# EAGLE board fsk_board (EAGLE 7.6.0)
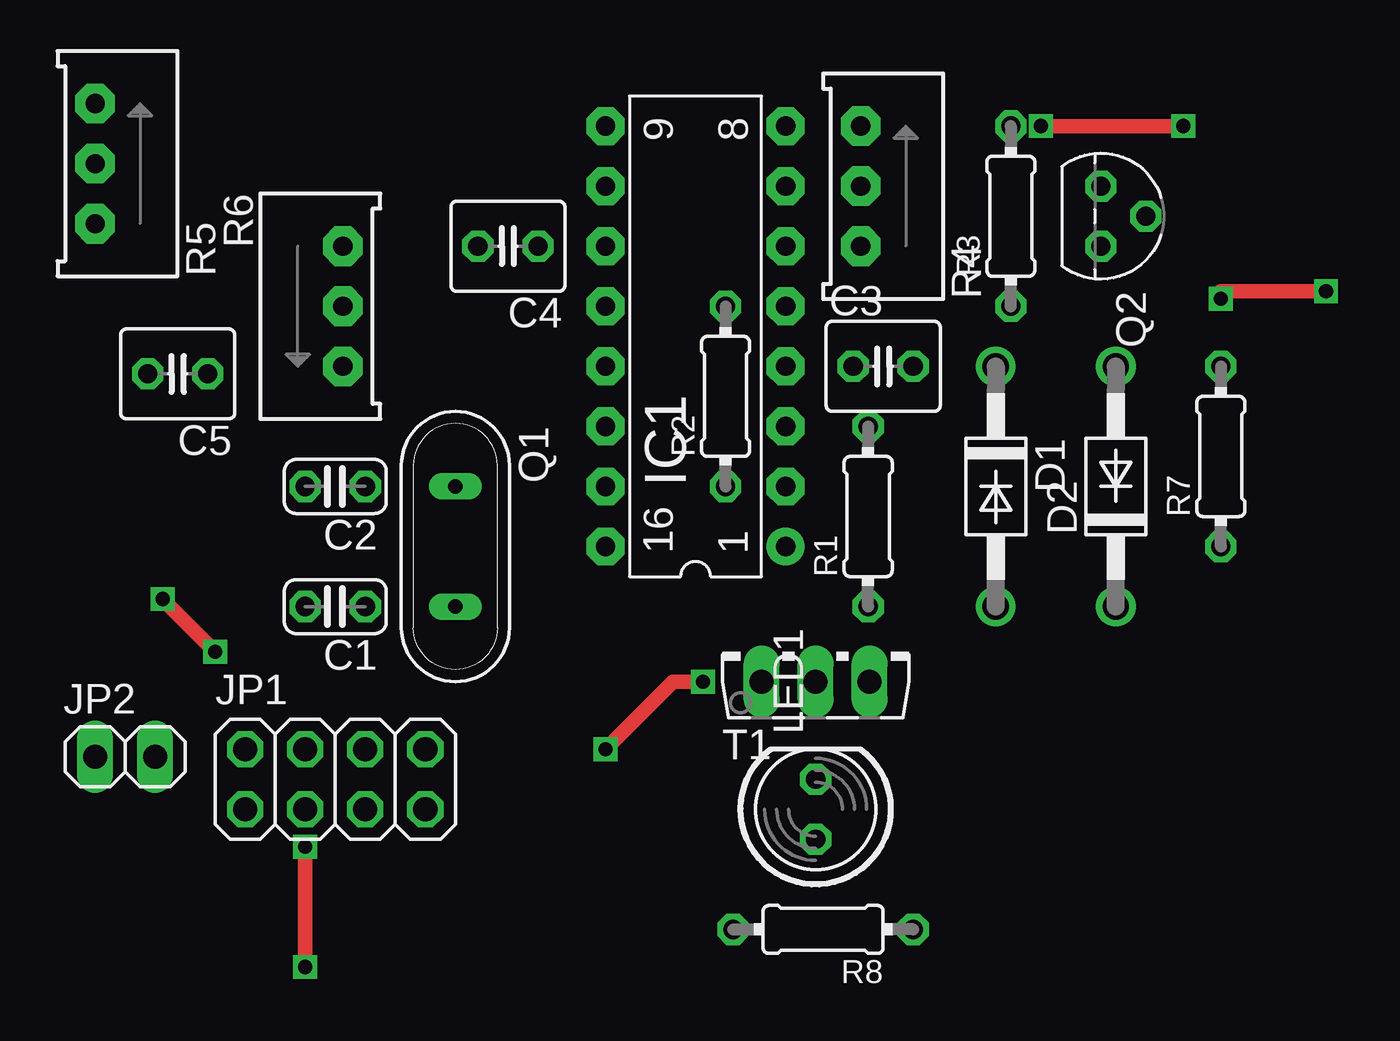
[diagram p0: board, top side]
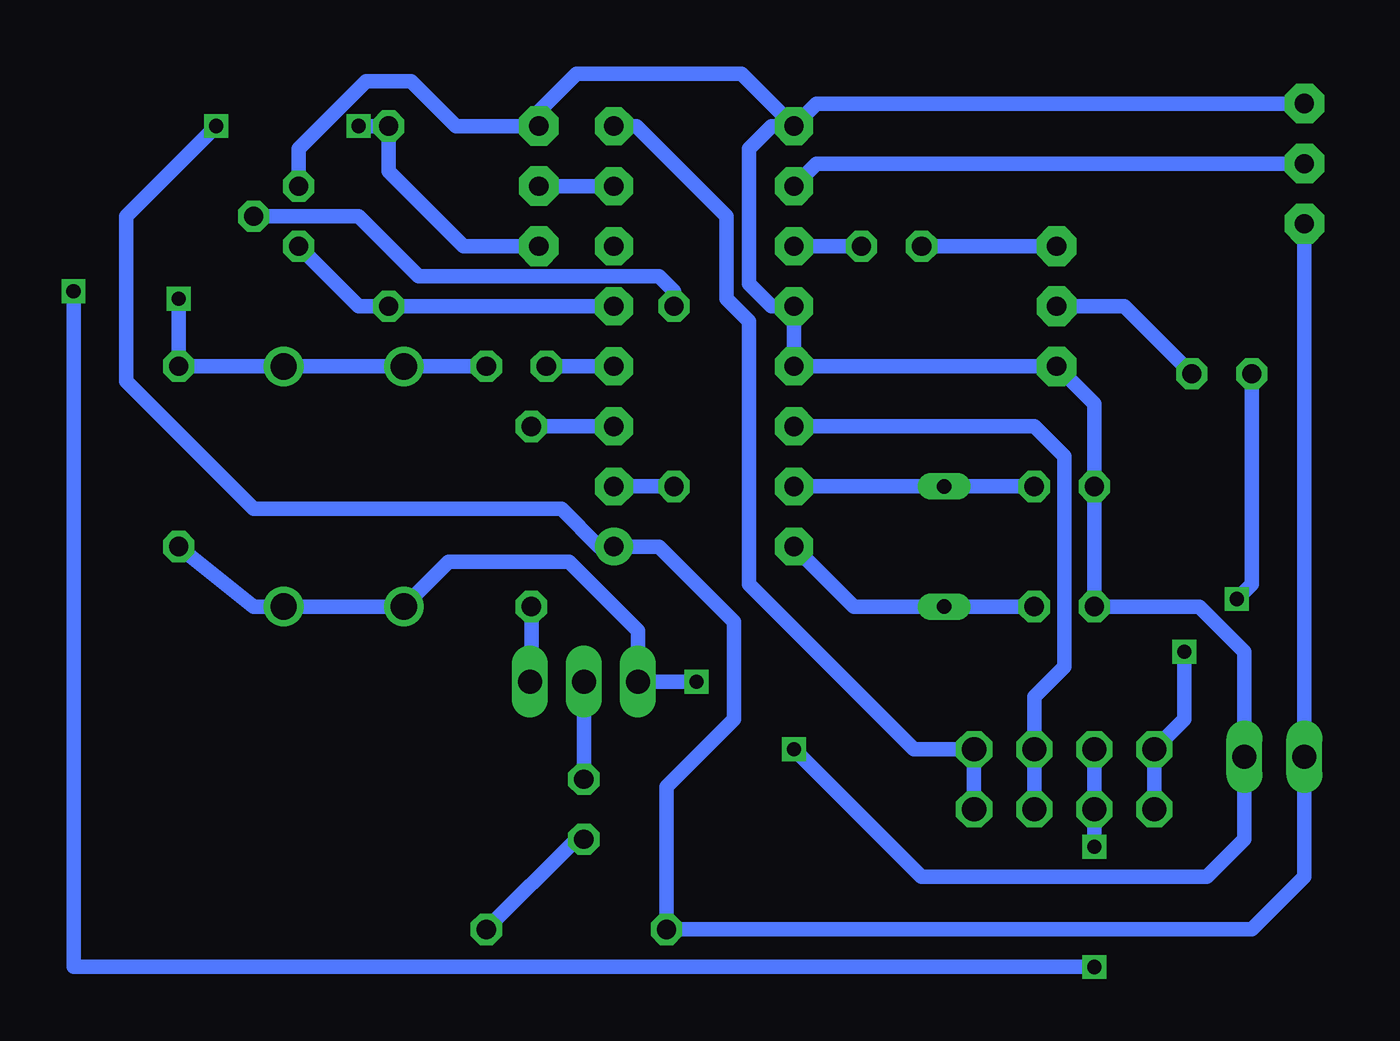
[diagram p1: board, bottom side, seen from below]

No outline drawn. Coordinates in mm, seen from the top.
Copper layers (1*16): Top 0.035mm / dielectric 1.5mm / Bottom 0.035mm
Design rules "default": minimum track width 10mil, minimum drill 24mil, track to track 8mil, track to pad 8mil, pad to pad 8mil, via to via 8mil, smd to smd 8mil, copper to edge 40mil, drill to drill 8mil, minimum pad ring 10mil, minimum via ring 8mil, stop-mask expansion 4mil, vias tented up to drill 0mil, thermal gap 10mil

## Footprints (pad centres in the part's own frame; a part is rotated, then mirrored left to right if it is on the bottom)
C025-024X044 = drill 0.813 octagon: 1 -1.27,0; 2 1.27,0
C025-040X050 = drill 0.813 octagon: 1 -1.27,0; 2 1.27,0
DO41-10 = drill 1.118: A 5.08,0; C -5.08,0
DIL16 = drill 0.813 pad 1.6: 1 -8.89,-3.81 | drill 0.813 pad 1.6 octagon: 2 -6.35,-3.81; 3 -3.81,-3.81; 4 -1.27,-3.81; 5 1.27,-3.81; 6 3.81,-3.81; 7 6.35,-3.81; 8 8.89,-3.81; 9 8.89,3.81; 10 6.35,3.81; 11 3.81,3.81; 12 1.27,3.81; 13 -1.27,3.81; 14 -3.81,3.81; 15 -6.35,3.81; 16 -8.89,3.81
2X04 = drill 1.016 octagon: 1 -3.81,-1.27; 2 -3.81,1.27; 3 -1.27,-1.27; 4 -1.27,1.27; 5 1.27,-1.27; 6 1.27,1.27; 7 3.81,-1.27; 8 3.81,1.27
1X02 = drill 1.016 long: 1 -1.27,0; 2 1.27,0
LED5MM = drill 0.813 octagon: A -1.27,0; K 1.27,0
QS = drill 0.61 long: 1 -2.54,0; 2 2.54,0
TO92 = drill 0.813 octagon: 1 1.27,0; 2 0,1.905; 3 -1.27,0
0204/7 = drill 0.813 octagon: 1 -3.81,0; 2 3.81,0
3386C = drill 0.813 pad 1.676 octagon: 1 2.54,1.27; 2 0,1.27; 3 -2.54,1.27
TO126AV = drill 1.016 long: B 2.286,-1.27; C 0,-1.27; E -2.286,-1.27

## Placement (x,y rotation side)
C1  [C025-024X044]  36.83,39.37 180 top
C2  [C025-024X044]  36.83,44.45 180 top
C3  [C025-040X050]  60.01,49.53 0 top
C4  [C025-040X050]  44.13,54.61 180 top
C5  [C025-040X050]  30.16,49.21 180 top
D1  1N4004  [DO41-10]  64.77,44.45 270 top
D2  1N4004  [DO41-10]  69.85,44.45 90 top
IC1  [DIL16]  52.07,50.8 90 top
JP1  [2X04]  36.83,32.07 0 top
JP2  [1X02]  27.94,33.02 0 top
LED1  [LED5MM]  57.15,30.8 90 top
Q1  [QS]  41.91,41.91 270 top
Q2  2N3904  [TO92]  69.22,55.88 270 top
R1  [0204/7]  59.37,43.18 90 top
R2  [0204/7]  53.34,48.26 90 top
R3  [0204/7]  65.41,55.88 90 top
R4  [3386C]  60.33,57.15 90 top
R5  [3386C]  27.94,58.1 90 top
R6  [3386C]  35.88,52.07 270 top
R7  [0204/7]  74.3,45.72 90 top
R8  [0204/7]  57.47,25.72 180 top
T1  BD139  [TO126AV]  57.15,37.47 0 top

## Library data of the parts
C1-C5 R1-R3 R7 R8 = rcl
D1 D2 = diode
IC1 = tcm3105
JP1 JP2 = pinhead
LED1 = led
Q1 = special
Q2 = Johnboiles
R4-R6 = bourns
T1 = transistor-power

## Nets
GND: C1.2 C2.2 D1.A D2.C IC1.9 IC1.12 IC1.13 JP2.2 Q2.3 R4.1 R5.1 R6.1 R7.1 T1.E
N$1: IC1.3 R1.2
N$2: R1.1 T1.B
N$3: LED1.K T1.C
N$4: C2.1 IC1.15 Q1.1
N$5: C1.1 IC1.16 Q1.2
N$6: LED1.A R8.1
N$7: IC1.2 R2.1
N$8: Q2.2 R2.2
N$9: IC1.5 Q2.1 R3.1
N$13: IC1.7 R4.2
N$14: IC1.10 R5.2
N$15: C3.1 IC1.4
N$16: C4.1 IC1.11
N$17: C4.2 R6.3
N$18: C5.1 R6.2
RXA: C3.2 D1.C D2.A JP1.3 JP1.4 R7.2
RXD: IC1.8 JP1.7 JP1.8
TXA: C5.2 JP1.1 JP1.2
TXD: IC1.14 JP1.5 JP1.6
VCC: IC1.1 JP2.1 R3.2 R4.3 R5.3 R8.2

## Tracks (layer width: path | path; a pad name or v marks a point on that pad's centre or on a via)
GND  (via drill 0.6)
  Top 0.61: v52.39,36.2 51.12,36.2 v48.26,33.34
  Bottom 0.61: IC1.9 49.21,59.69 50.16,58.74 50.16,53.02 49.21,52.07 IC1.12 IC1.13 R6.1 35.56,47.94 C2.2 C1.2 31.11,39.37 29.21,37.47 JP2.2 29.21,29.53 30.8,27.94 42.86,27.94 v48.26,33.34 | R5.1 47.31,60.64 IC1.9 | IC1.9 50.48,61.91 57.47,61.91 59.05,60.33 R4.1 62.55,59.69 64.45,61.59 66.36,61.59 69.22,58.74 Q2.3 | R7.1 71.12,39.37 D2.C D1.A 62.87,41.27 57.78,41.27 54.86,38.35 T1.E v52.39,36.2
N$1
  Bottom 0.61: IC1.3 R1.2
N$2
  Bottom 0.61: R1.1 59.37,36.26 T1.B
N$3
  Bottom 0.61: T1.C LED1.K
N$4
  Bottom 0.61: IC1.15 Q1.1 C2.1
N$5
  Bottom 0.61: C1.1 Q1.2 45.72,39.37 IC1.16
N$6
  Bottom 0.61: LED1.A 57.47,29.53 R8.1
N$7
  Bottom 0.61: R2.1 IC1.2
N$8
  Bottom 0.61: R2.2 53.34,52.7 53.98,53.34 64.14,53.34 66.67,55.88 Q2.2
N$9
  Bottom 0.61: IC1.5 R3.1 66.67,52.07 Q2.1
N$13
  Bottom 0.61: IC1.7 R4.2
N$14
  Bottom 0.61: R5.2 47.31,58.1 IC1.10
N$15
  Bottom 0.61: IC1.4 C3.1
N$16
  Bottom 0.61: IC1.11 C4.1
N$17
  Bottom 0.61: C4.2 R6.3
N$18
  Bottom 0.61: R6.2 34.29,52.07 C5.1
RXA  (via drill 0.6)
  Top 0.61: v35.56,29.21 v35.56,24.13 | v78.74,52.7 74.3,52.7 v74.3,52.39
  Bottom 0.61: C3.2 D1.C D2.A R7.2 v74.3,52.39 | JP1.3 JP1.4 v35.56,29.21 | v35.56,24.13 78.74,24.13 v78.74,52.7
RXD
  Bottom 0.61: JP1.7 JP1.8 43.18,33.34 50.16,40.32 50.16,51.44 51.12,52.39 51.12,55.88 54.93,59.69 IC1.8
TXA  (via drill 0.6)
  Top 0.61: v29.53,39.69 v31.75,37.47
  Bottom 0.61: JP1.1 JP1.2 31.75,34.61 v31.75,37.47 | C5.2 28.89,40.32 v29.53,39.69
TXD
  Bottom 0.61: JP1.5 JP1.6 38.1,35.56 36.83,36.83 36.83,45.72 38.1,46.99 IC1.14
VCC  (via drill 0.6)
  Top 0.61: v72.71,59.69 v66.67,59.69
  Bottom 0.61: R5.3 JP2.1 26.67,27.94 28.89,25.72 R8.2 53.66,31.75 50.8,34.61 50.8,38.73 53.98,41.91 IC1.1 56.52,41.91 58.1,43.5 71.12,43.5 76.52,48.9 76.52,55.88 v72.71,59.69 | R4.3 62.23,54.61 65.41,57.78 R3.2 v66.67,59.69